# Altium PCB PCB_v1.PcbDoc
Units mm, origin at the board's own origin, x right, y up, seen from the top; angles counter-clockwise.
Board outline 95.88 x 51.31 mm, 2 copper layers (Top Layer, Bottom Layer); 63 components, 51 nets, 266 pads, 97 vias.
Unrouted connection lines stored in the file: 53.
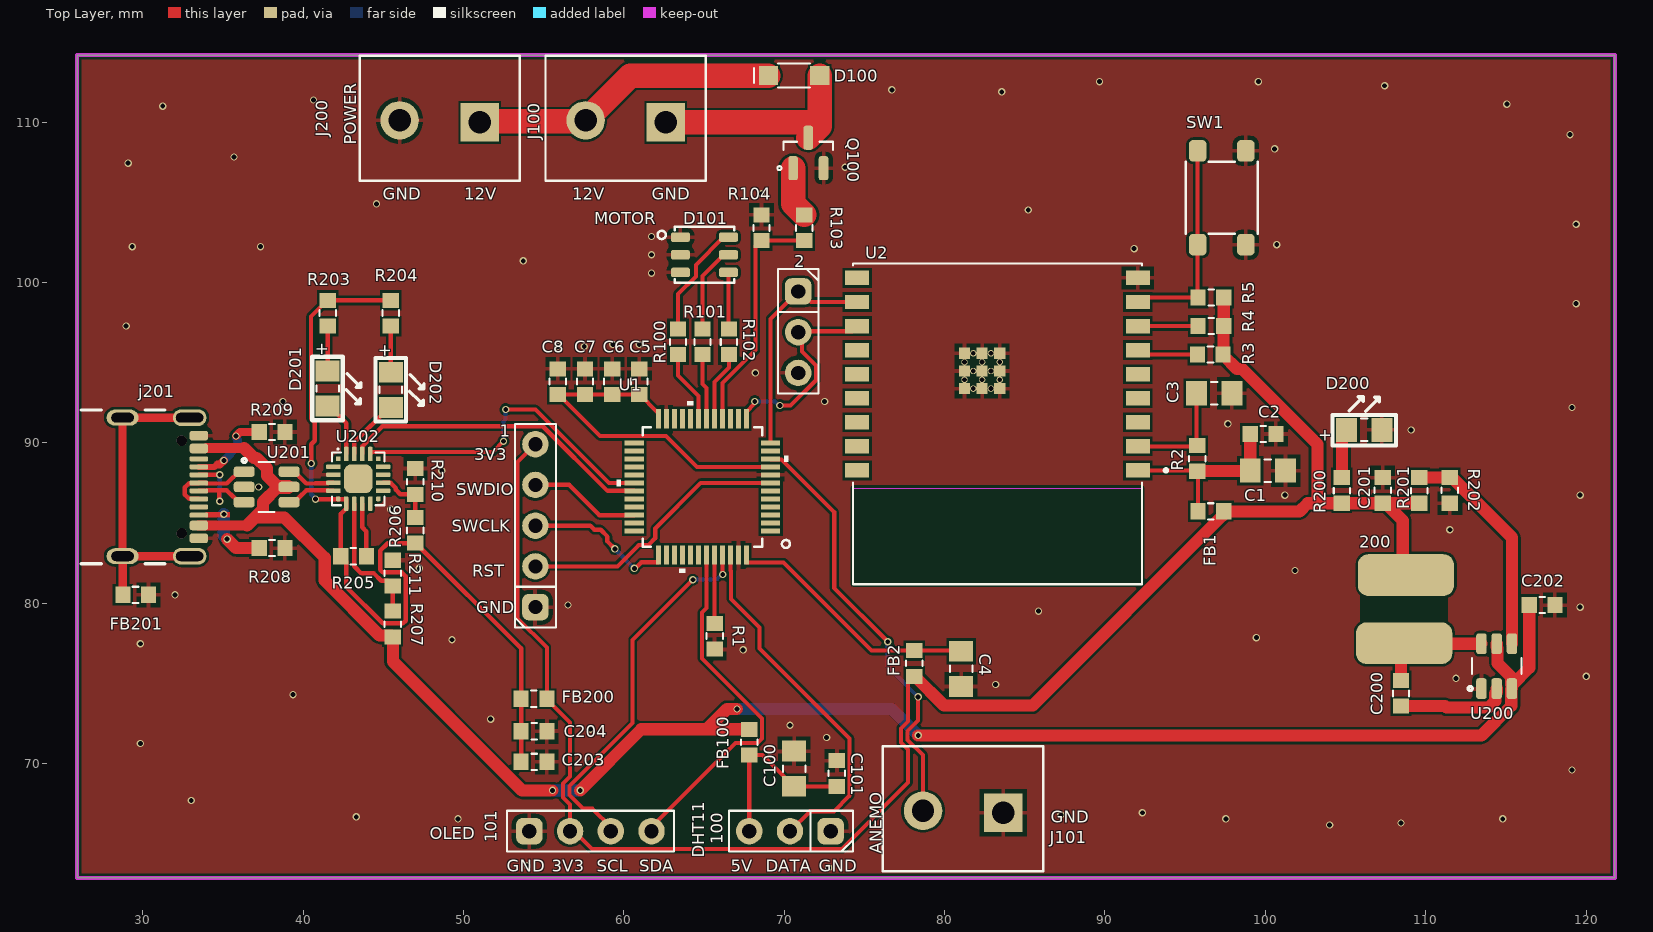
[diagram p0: Top Layer view]
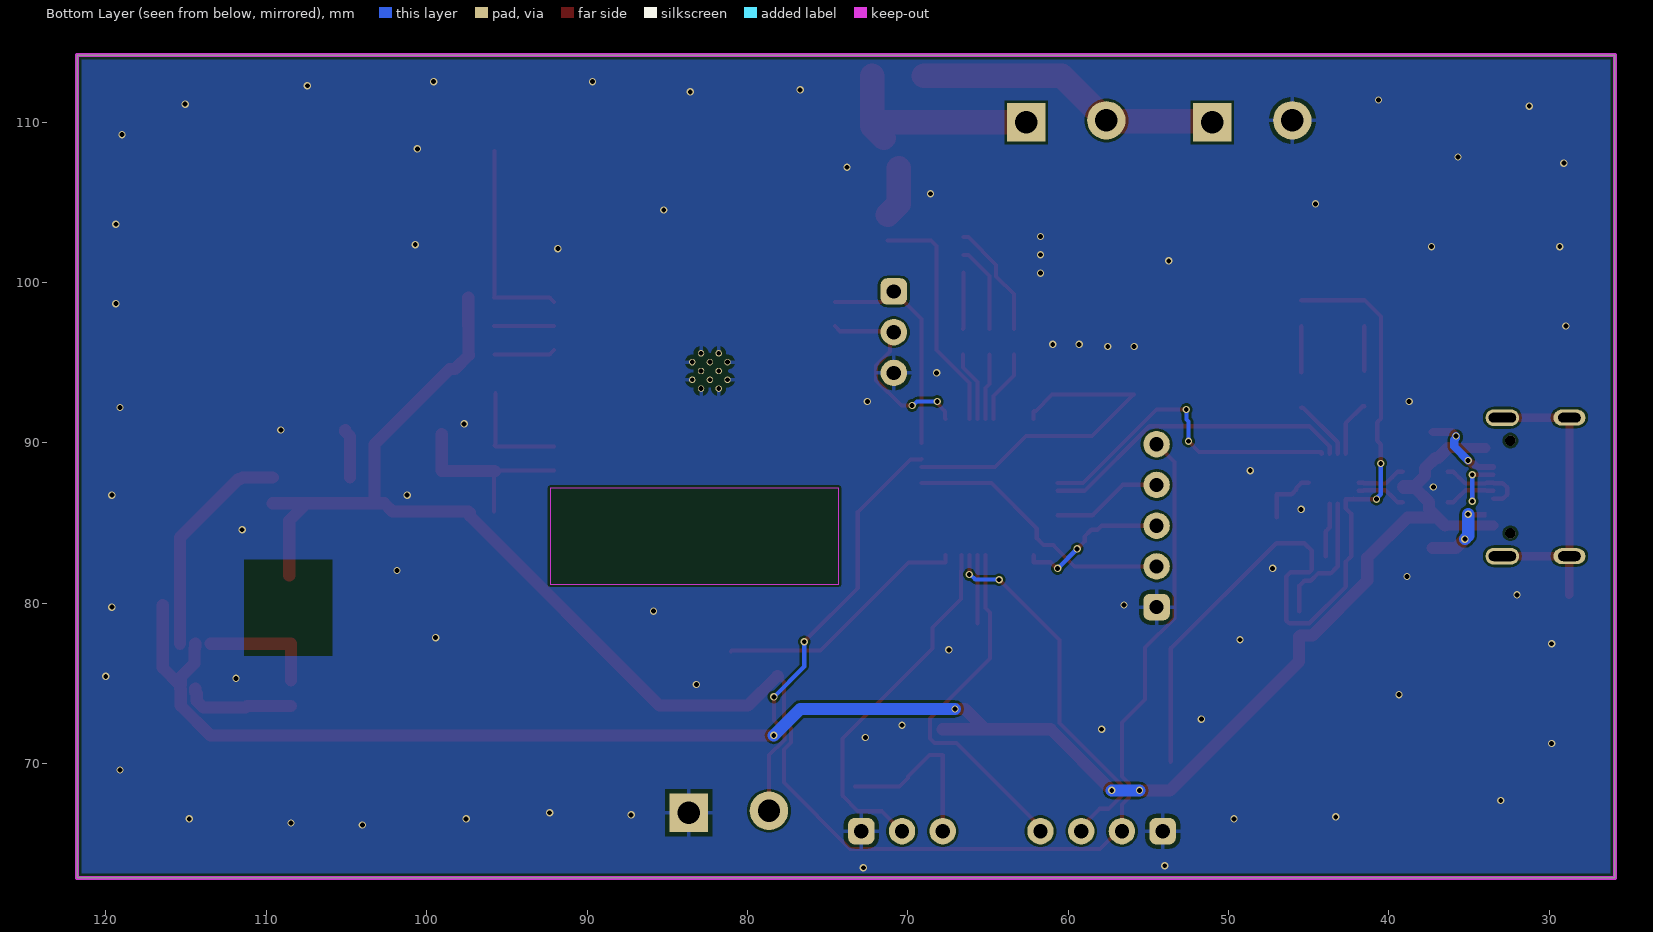
[diagram p1: Bottom Layer view, seen from below]
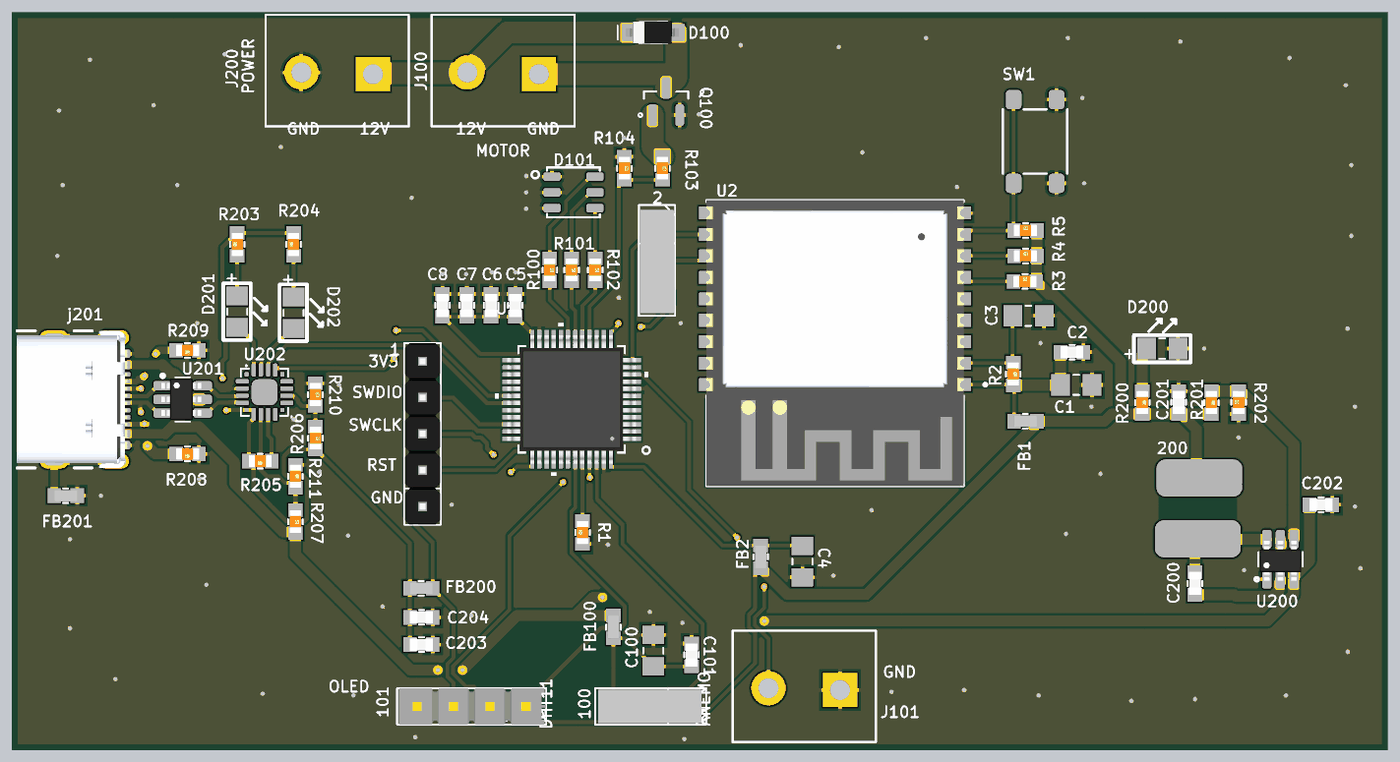
[diagram p2: 3D render of the assembled board from above, using the file's embedded part models]

## Layer stack, top to bottom
Top Solder: solder mask 0.0102, Solder Resist, Dk 3.5
Top Layer: signal copper 0.0356
Dielectric 1: dielectric 0.32, FR-4, Dk 4.8
Bottom Layer: signal copper 0.0356
Bottom Solder: solder mask 0.0102, Solder Resist, Dk 3.5

## Board outline
25.908,62.865 25.908,114.173 121.793,114.173 121.793,62.865

## Design rules (kind name [scope] priority, off if disabled: settings)
Clearance [All] p1: gap=0.152 ignorepadtopadclearanceinfootprint=FALSE
DiffPairsRouting DiffPairsRouting_USB [InDifferentialPairClass('USB_2.0')] p1: maxlimit=0.152 minlimit=0.152 mostfreqgap=0.152 toplayer_minwidth=0.279 toplayer_maxwidth=0.787 toplayer_prefwidth=0.787 bottomlayer_minwidth=0.279 bottomlayer_maxwidth=0.787 bottomlayer_prefwidth=0.787 maxuncoupledlength=12.7
HoleSize [All] p1: absolutevalues=TRUE maxlimit=25.4 minlimit=0.254 maxpercent=80.000 minpercent=20.000
MatchedLengths [InDifferentialPairClass('USB_2.0')] p1: tolerance=1.27 checknetsindiffpair=TRUE checkdiffpairvsdiffpair=FALSE checkxsignals=FALSE checkothers=FALSE
MinimumSolderMaskSliver [All] p1: minsoldermaskwidth=0.102
PolygonConnect PolygonConnect_via [IsVia] p1: connectstyle=Direct reliefconductorwidth=0.254 reliefentries=4 polygonreliefangle="90 Angle" airgapwidth=0.254
PolygonConnect [All] p2: connectstyle=Relief reliefconductorwidth=0.254 reliefentries=4 polygonreliefangle="90 Angle" airgapwidth=0.254
RoutingVias [All] p1: holewidth=0.305 width=0.457 viastyle="Through Hole" minholewidth=0.305 minwidth=0.457 maxholewidth=25.4 maxwidth=25.4
SilkToSilkClearance [All] p1: silktosilkclearance=0.025
SilkToSolderMaskClearance [IsPad] p1: minsilkscreentomaskgap=0.025 clearancetoexposedcopper=TRUE
SolderMaskExpansion [All] p1: expansion=0.102 istentingtop=FALSE
SupplyNets "Schematic Supply Nets_6" [InNet('3V3_ESP32')] p1: voltage=0.000
SupplyNets "Schematic Supply Nets_5" [InNet('3V3_CP')] p2: voltage=0.000
SupplyNets "Schematic Supply Nets_4" [InNet('VUSB')] p3: voltage=0.000
SupplyNets "Schematic Supply Nets_3" [InNet('3V3_MCU')] p4: voltage=0.000
SupplyNets "Schematic Supply Nets_2" [InNet('3V3')] p5: voltage=0.000
SupplyNets "Schematic Supply Nets_1" [InNet('GND')] p6: voltage=0.000
SupplyNets "Schematic Supply Nets" [InNet('12V')] p7: voltage=0.000
Width Width_3V3_1A [InNet('3V3')] p1: maxlimit=0.762 minlimit=0.254 preferedwidth=0.762
Width Width_2A [InNetClass('12V_2A')] p2: maxlimit=1.524 minlimit=0.254 preferedwidth=1.524
Width Width_1A [InNetClass('5V_1A')] p3: maxlimit=0.762 minlimit=0.254 preferedwidth=0.762
Width [All] p4: maxlimit=1.524 minlimit=0.152 preferedwidth=0.254
25 further rules are at their usual default settings.

## Classes and differential pairs
net class 12V_2A: 12V NetD100_2
net class 5V_1A: 3V3 Net200_1 NetC200_2 VUSB
differential pair class USB_2.0: DATA USB_D
component class Designator: 200 C200 C201 C202 C203 C204 D200 D201 D202 FB200 FB201 J200 j201 R200 R201 R202 R203 R204 R205 R206 R207 R208 R209 R210 R211 U200 U201 U202
differential pair USB_D: +USB_D_P -USB_D_N
differential pair DATA: +DATA_P -DATA_N

## Components (designator, comment, footprint, x,y, rotation, side; value= is the part's Value field where it differs from the comment)
1 "5x1" H_5x1_TH_100mil 54.483,84.836 r90 top
2 "3x1" H_3X1_TH_100mil 70.866,96.901 r270 top
100 "3x1" H_3X1_TH_100mil 70.358,65.786 r180 top
101 "4x1" H_4x1_TH_2.54mm 57.912,65.786 r0 top
200 "2.2uH 4A" Ind_5.8*5.2_NS 108.712,79.629 r90 top value=2.2uH
C1 "10uF 25V" 0805_cap 100.16,88.265 r0 top value=10uF
C2 "0.1uF 50V" 0603_cap 99.86,90.551 r0 top value=0.1uF
C3 "10uF 25V" 0805_cap 96.817,93.091 r0 top value=10uF
C4 "10uF 25V" 0805_cap 81.026,75.903 r270 top value=10uF
C5 "0.1uF 50V" 0603_cap 60.96,93.815 r90 top value=0.1uF
C6 "0.1uF 50V" 0603_cap 59.267,93.815 r90 top value=0.1uF
C7 "0.1uF 50V" 0603_cap 57.573,93.815 r90 top value=0.1uF
C8 "0.1uF 50V" 0603_cap 55.88,93.815 r90 top value=0.1uF
C100 "10uF 25V" 0805_cap 70.612,69.68 r90 top value=10uF
C101 "0.1uF 50V" 0603_cap 73.279,69.38 r90 top value=0.1uF
C200 "0.1uF 50V" 0603_cap 108.458,74.384 r270 top value=0.1uF
C201 "22uF 10V" 0603_cap 107.315,87.033 r90 top value=22uF
C202 "10uF 10V" 0603_cap 117.259,79.883 r0 top value=10uF
C203 "10uF 10V" 0603_cap 54.394,70.104 r0 top value=10uF
C204 "0.1uF 50V" 0603_cap 54.394,72.009 r0 top value=0.1uF
D100 "40V 1A" SOD_123 70.612,112.903 r0 top
D101 "RGB" RGB_NS_3.5X3.7 65.024,101.727 r0 top
D200 "2.9V" 0805_LED 106.172,90.805 r0 top
D201 "2.9V" 0805_LED 41.529,93.388 r270 top
D202 "2V" 0805_LED 45.466,93.302 r270 top
FB1 "60OHM 2A" 0603_fb 96.609,85.725 r180 top value="60 OHM"
FB2 "60OHM 2A" 0603_fb 78.105,76.238 r90 top value="60 OHM"
FB100 "60OHM 2A" 0603_fb 67.818,71.336 r270 top value="60 OHM"
FB200 "60OHM 2A" 0603_fb 54.394,74.041 r180 top value="60 OHM"
FB201 "60OHM 2A" 0603_fb 29.553,80.518 r180 top value="60 OHM"
J100 "Connector 2pos" CON_2x1_TH_5MM 60.111,110.236 r180 top
J101 "Connector 2pos" CON_2x1_TH_5MM 81.153,67.183 r180 top
J200 "Connector 2pos" CON_2x1_TH_5MM 48.514,110.236 r180 top
j201 "USB C" CON_USB_C_16P_RA 31.115,87.249 r270 top
Q100 "N CH" SOT_23_3 71.501,108.077 r90 top
R1 "10k 1/10W" 0603_res 65.659,77.94 r90 top value=10k
R2 "1k 1/10W" 0603_res 95.758,89.027 r270 top value=1k
R3 "1k 1/10W" 0603_res 96.571,95.504 r0 top value=1k
R4 "1k 1/10W" 0603_res 96.609,97.282 r0 top value=1k
R5 "1k 1/10W" 0603_res 96.609,99.06 r0 top value=1k
R100 "100R 1/10W" 0603_res 63.373,96.304 r270 top value=100R
R101 "100R 1/10W" 0603_res 64.897,96.304 r270 top value=100R
R102 "100R 1/10W" 0603_res 66.548,96.304 r270 top value=100R
R103 "10k 1/10W" 0603_res 71.247,103.416 r270 top value=10k
R104 "10k 1/10W" 0603_res 68.58,103.416 r270 top value=10k
R200 "100R 1/10W" 0603_res 104.775,87.033 r270 top value=100R
R201 "33k2 1/10W" 0603_res 109.601,87.033 r270 top value=33k2
R202 "10k 1/10W" 0603_res 111.506,87.033 r90 top value=10k
R203 "84R5 1/10W" 0603_res 41.529,98.082 r90 top value=84R5
R204 "150R 1/10W" 0603_res 45.466,98.082 r90 top value=150R
R205 "1k 1/10W" 0603_res 43.142,82.931 r180 top value=1k
R206 "10k 1/10W" 0603_res 46.99,84.544 r270 top value=10k
R207 "33k2 1/10W" 0603_res 45.593,78.702 r270 top value=33k2
R208 "4k7 1/10W" 0603_res 38.062,83.439 r180 top value=4k7
R209 "4k7 1/10W" 0603_res 38.062,90.678 r180 top value=4k7
R210 "10k 1/10W" 0603_res 46.99,87.592 r270 top value=10k
R211 "54k9 1/10W" 0603_res 45.593,81.877 r270 top value=54k9
SW1 "Sw" Sw_PUSH_4.5x4.5x5mm 97.282,105.283 r270 top
U1 "STM32F030C8T6TR" LQFP48_7x7mm 64.897,87.249 r180 top
U2 "ESP32-C3-WROOM-02-N4" ESP32-C3-WROOM-02-N4 83.299,94.282 r180 top
U200 "TPS564201DDCR" SOT_23_6 114.427,76.073 r90 top
U201 "USBLC6-2SC6" SOT_23_6 37.719,87.249 r0 top
U202 "CP2102N-A02-GQFN20R" WFQFN_20_EP_3X3MM 43.434,87.757 r0 top

## Footprints (in the part's own frame and the unit in brackets; to place one, negate y for a bottom-side part, rotate by r counter-clockwise, add the part's x,y. Pads: shape width x height; smd on the part's side, far side on the other; paste and mask are expansions set on the pad)
0603_cap [mil]
  rect 37x40 smd: 1(-31.5,0) 2(31.5,0)
  silkscreen extent -6,-20 8,20, body extent -31,-17 31,17, height 34
0603_fb [mil]
  rect 37x40 smd: 1(-31.5,0) 2(31.5,0)
  silkscreen extent -7,-20 8,20, body extent -32,-16 31,16, height 32
0603_res [mil] "1608 Metric / 20190225 / C-A.Serna.A"
  rect 37x40 smd: 1(-31.5,0) 2(31.5,0)
  silkscreen extent -7,-20 8,20, body extent -31,-16 32,16, height 12
0805_cap [mm]
  rect 1.3x1.5 smd: 1(-1.1,0) 2(1.1,0)
  silkscreen extent -0.2,-0.7 0.2,0.7, body extent -1.13,-0.7 1.07,0.7, height 1
0805_LED [mm]
  rect 1.3x1.5 smd: 1(-1.1,0) 2(1.1,0)
  silkscreen extent -1.98,-0.97 1.98,2.07, body extent -1,-0.62 1,0.63, height 1.1
CON_2x1_TH_5MM [mm]
  rect 2.4x2.4 hole 1.4: 1(-2.5,0.254)
  round 2.4 hole 1.4: 2(2.5,0.127)
  silkscreen extent -5,-3.9 5,3.9, body extent -5,-3.9 5,3.9, height 10.2
CON_USB_C_16P_RA [mm]
  oval 1.05x2.1 hole 0.6 slot 1.7 at 90 deg: 0(-4.32,1.803) 0(4.32,1.803)
  oval 1x2 hole 0.6 slot 1.4 at 90 deg: 0(-4.32,-2.377) 0(4.32,-2.377)
  rrect50% 0.6x1.15 smd: A1/B12(-3.2,2.378) A4/B9(-2.4,2.378) B1/A12(3.2,2.378) B4/A9(2.4,2.378)
  rrect50% 0.3x1.15 smd: A5(-1.25,2.378) A6(-0.25,2.378) A7(0.25,2.378) A8(1.25,2.378) B5(1.75,2.378) B6(0.75,2.378) B7(-0.75,2.378) B8(-1.75,2.378)
  round 0.65 hole 0.65 unplated: ""(-2.89,1.303) ""(2.89,1.303)
  silkscreen extent -4.79,-4.98 4.79,0.27, body extent -4.79,-4.98 4.79,2.73, height 3.31
ESP32-C3-WROOM-02-N4 [mm]
  rect 1.5x0.9 smd: 1(-8.75,6) 2(-8.75,4.5) 3(-8.75,3) 4(-8.75,1.5) 5(-8.75,0) 6(-8.75,-1.5) 7(-8.75,-3) 8(-8.75,-4.5) 9(-8.75,-6) 10(8.75,-6) 11(8.75,-4.5) 12(8.75,-3) 13(8.75,-1.5) 14(8.75,0) 15(8.75,1.5) 16(8.75,3) 17(8.75,4.5) 18(8.75,6)
  rect 0.7x0.7 smd: 19(-0.14,0.9) 19(-0.14,-0.2) 19(-0.14,-1.3) 19(0.96,0.9) 19(0.96,-0.2) 19(0.96,-1.3) 19(2.06,-1.3) 19(2.06,-0.2) 19(2.06,0.9)
  round 0.4 hole 0.3 mask+0: 19(-0.14,0.35) 19(-0.14,-0.75) 19(0.41,0.9) 19(0.41,-0.2) 19(0.41,-1.3) 19(0.96,0.35) 19(0.96,-0.75) 19(1.51,0.9) 19(1.51,-0.2) 19(1.51,-1.3) 19(2.06,-0.75) 19(2.06,0.35)
  Keep-Out Layer region: 9,7.1 -9,7.1 -9,13.1 9,13.1
  Keep-Out Layer region: 9,7.1 -9,7.1 -9,13.1 9,13.1
  silkscreen extent -10.6,-6.9 9,13.1, body extent -9,-6.9 9,13.1, height 3.35
H_3X1_TH_100mil [mil]
  rrect50% 65x65 hole 35: 1(-100,0)
  round 65 hole 35: 2(0,0) 3(100,0)
  silkscreen extent -155,-50 150,50, body extent -142,-46 142,46, height 320
H_4x1_TH_2.54mm [mil]
  rrect50% 65x65 hole 35: 1(-150,0)
  round 65 hole 35: 2(-50,0) 3(50,0) 4(150,0)
  silkscreen extent -205,-50 205,50, body extent -200,-50 205,50, height 420
H_5x1_TH_100mil [mil]
  rrect50% 65x65 hole 35: 1(-200,0)
  round 65 hole 35: 2(-100,0) 3(0,0) 4(100,0) 5(200,0)
  silkscreen extent -250,-50 250,50, body extent -250,-49 250,49, height 335
Ind_5.8*5.2_NS [mm]
  rrect50% 2.6x6 smd: 1(-2.125,0.053) 2(2.125,-0.053)
  body extent -3,-2.75 3,2.75, height 4.5
LQFP48_7x7mm [mm]
  rect 1.194x0.305 smd paste+0 mask+0.046: 1(-4.25,2.75) 2(-4.25,2.25) 3(-4.25,1.75) 4(-4.25,1.25) 5(-4.25,0.75) 6(-4.25,0.25) 7(-4.25,-0.25) 8(-4.25,-0.75) 9(-4.25,-1.25) 10(-4.25,-1.75) 11(-4.25,-2.25) 12(-4.25,-2.75) 25(4.25,-2.75) 26(4.25,-2.25) 27(4.25,-1.75) 28(4.25,-1.25) 29(4.25,-0.75) 30(4.25,-0.25) 31(4.25,0.25) 32(4.25,0.75) 33(4.25,1.25) 34(4.25,1.75) 35(4.25,2.25) 36(4.25,2.75)
  rect 0.305x1.194 smd paste+0 mask+0.046: 13(-2.75,-4.25) 14(-2.25,-4.25) 15(-1.75,-4.25) 16(-1.25,-4.25) 17(-0.75,-4.25) 18(-0.25,-4.25) 19(0.25,-4.25) 20(0.75,-4.25) 21(1.25,-4.25) 22(1.75,-4.25) 23(2.25,-4.25) 24(2.75,-4.25) 37(2.75,4.25) 38(2.25,4.25) 39(1.75,4.25) 40(1.25,4.25) 41(0.75,4.25) 42(0.25,4.25) 43(-0.25,4.25) 44(-0.75,4.25) 45(-1.25,4.25) 46(-1.75,4.25) 47(-2.25,4.25) 48(-2.75,4.25)
  silkscreen extent -5.46,-5.35 5.35,5.35, body extent -4.5,-4.5 4.5,4.5, height 1.6
RGB_NS_3.5X3.7 [mm]
  rrect50% 1.2x0.6 smd: 1(-1.5,1.1) 2(-1.5,0) 3(-1.5,-1.1) 4(1.5,-1.1) 5(1.5,0) 6(1.5,1.1)
  silkscreen extent -2.92,-1.75 1.85,1.75, body extent -1.85,-1.74 1.85,1.75, height 1
SOD_123 [mm]
  rect 1.2x1.2 smd: 1(-1.6,0) 2(1.6,0)
  silkscreen extent -2.5,-0.75 1,0.75, body extent -1.93,-0.8 1.77,0.8, height 1.28
SOT_23_3 [mm]
  rrect50% 1.5x0.6 smd: 1(-0.95,0.95) 2(-0.95,-0.95) 3(0.95,0)
  silkscreen extent -1.07,-1.55 0.7,1.92, body extent -0.7,-1.52 0.7,1.53, height 1.12
SOT_23_6 [mm]
  rrect50% 1.3x0.65 smd: 1(-1.4,0.95) 2(-1.4,0) 3(-1.4,-0.95) 4(1.4,-0.95) 5(1.4,0) 6(1.4,0.95)
  silkscreen extent -1.52,-1.55 0.5,1.78, body extent -1.5,-1.45 1.3,1.45, height 1.45
Sw_PUSH_4.5x4.5x5mm [mm]
  rrect50% 1.35x1.1 smd: 1(-2.925,1.5) 1(2.925,1.5) 2(-2.925,-1.5) 2(2.925,-1.5)
  silkscreen extent -2.25,-2.25 2.25,2.25, body extent -2.25,-2.25 2.25,2.25, height 5
WFQFN_20_EP_3X3MM [mm]
  rrect50% 0.3x0.3 smd: 1(-1.25,1.25) 6(-1.25,-1.25) 11(1.25,-1.25)
  rrect50% 0.9x0.3 smd: 2(-1.55,0.75) 3(-1.55,0.25) 4(-1.55,-0.25) 5(-1.55,-0.75) 12(1.55,-0.75) 13(1.55,-0.25) 14(1.55,0.25) 15(1.55,0.75)
  rrect50% 0.3x0.9 smd: 7(-0.75,-1.55) 8(-0.25,-1.55) 9(0.25,-1.55) 10(0.75,-1.55) 17(0.75,1.55) 18(0.25,1.55) 19(-0.25,1.55) 20(-0.75,1.55)
  rect 0.3x0.3 smd: 16(1.25,1.25)
  rrect50% 1.8x1.8 smd: 21(0,0)
  silkscreen extent -1.65,-1.65 1.65,1.9, body extent -1.5,-1.5 1.5,1.5, height 0.8

## Part data
1: library part H_Male_5x1_TH_100mil, "H_Male_5x1_TH_100mil", ComponentLink1Description=LCSC
2 100: library part H_Male_3x1_TH_100mil, "H_Male_3x1_TH_100mil", ComponentLink1Description=LCSC
101: library part H_Male_4x1_TH_100mil, "H_Male_4x1_TH_100mil", ComponentLink1Description=LCSC
200: library part Inductor_2.2uH_4A_5.8*5.2mm, "4A 2.2uH ±20% 22.1mΩ SMD,5.8x5.2mm Inductors (SMD) ROHS", Manufacturer="SHOU HAN", Manufacturer Part Number=CY54-2.2UH, Supplier Part Number 1=C2929427, ComponentLink1Description=LCSC, ComponentLink1URL=https://lcsc.com/product-detail/Inductors-SMD_SHOU-HAN-CY54-2-2UH_C2929427.html, Supplier 1=LCSC
C1 C3 C4 C100: library part Cap_10uF_0805_25V_, "25V 10uF X5R ±10% 0805 Multilayer Ceramic Capacitors MLCC - SMD/SMT ROHS", Manufacturer="Samsung Electro-Mechanics", Manufacturer Part Number=CL21A106KAYNNNE, Supplier Part Number 1=C15850, ComponentLink1Description=LCSC, ComponentLink1URL=https://lcsc.com/product-detail/Multilayer-Ceramic-Capacitors-MLCC-SMD-SMT_Samsung-Electro-Mechanics-CL21A106KAYNNNE_C15850.html, Supplier 1=LCSC
C2 C5 C6 C7 C8 C101 C200 C204: library part Cap_0.1uF_0603_50V, "50V 100nF Y5V -20%~+80% 0603 Multilayer Ceramic Capacitors MLCC - SMD/SMT ROHS", Manufacturer="Walsin Tech Corp", Manufacturer Part Number=0603F104Z500CT, Supplier Part Number 1=C83060, ComponentLink1Description=LCSC, ComponentLink1URL=https://www.lcsc.com/product-detail/Multilayer-Ceramic-Capacitors-MLCC-SMD-SMT_Walsin-Tech-Corp-0603F104Z500CT_C83060.html, Supplier 1=LCSC
C201: library part Cap_22uF_0603_10V, "10V 22uF X5R ±20% 0603 Multilayer Ceramic Capacitors MLCC - SMD/SMT ROHS", Manufacturer=HRE, Manufacturer Part Number=CGA0603X5R226M100JT, Supplier Part Number 1=C6119863, ComponentLink1Description=LCSC, ComponentLink1URL=https://lcsc.com/product-detail/Multilayer-Ceramic-Capacitors-MLCC-SMD-SMT_HRE-CGA0603X5R226M100JT_C6119863.html, Supplier 1=LCSC
C202 C203: library part Cap_10uF_0603_10V, "10V 10uF X5R ±10% 0603 Multilayer Ceramic Capacitors MLCC - SMD/SMT ROHS", Manufacturer=CCTC, Manufacturer Part Number=TCC0603X5R106K100CT, Supplier Part Number 1=C380314, ComponentLink1Description=LCSC, ComponentLink1URL=https://www.lcsc.com/product-detail/Multilayer-Ceramic-Capacitors-MLCC-SMD-SMT_CCTC-TCC0603X5R106K100CT_C380314.html, Supplier 1=LCSC
D100: library part D_Schottky_40V_1A_SOD_123F, "DIODE SCHOTTKY 40V 1A SOD123F", Manufacturer="Shanghai Prisemi Elec", Manufacturer Part Number=PSBD1DF40V1H, Supplier Part Number 1=C110730, ComponentLink1Description=LCSC, ComponentLink1URL=https://www.lcsc.com/product-detail/Switching-Diode_Shanghai-Prisemi-Elec-PSBD1DF40V1H_C110730.html, Supplier 1=LCSC
D101: library part LED_RGB_3535_SMD, "-30℃~+85℃ RGB 110° 3535(mm) Light Emitting Diodes (LED) ROHS", Manufacturer="Foshan NationStar Optoelectronics", Manufacturer Part Number=RS-3535MWAM, Supplier Part Number 1=C842778, ComponentLink1Description=LCSC, ComponentLink1URL=https://www.lcsc.com/product-detail/Light-Emitting-Diodes-LED_Foshan-NationStar-Optoelectronics-RS-3535MWAM_C842778.html, Supplier 1=LCSC
D200 D201: library part LED_0805_Green, "LED GREEN CLEAR 0805 SMD", Manufacturer=XINGLIGHT, Manufacturer Part Number=XL-2012UGC, Supplier Part Number 1=C965815, ComponentLink1Description=LCSC, ComponentLink1URL=https://www.lcsc.com/product-detail/Light-Emitting-Diodes-LED_XINGLIGHT-XL-2012UGC_C965815.html, Supplier 1=LCSC
D202: library part LED_0805_RED, "LED RED CLEAR 0805 SMD", Manufacturer=XINGLIGHT, Manufacturer Part Number=XL-2012SURC, Supplier Part Number 1=C965812, ComponentLink1Description=LCSC, ComponentLink1URL=https://www.lcsc.com/product-detail/Light-Emitting-Diodes-LED_XINGLIGHT-XL-2012SURC_C965812.html, Supplier 1=LCSC
FB1 FB2 FB100 FB200 FB201: library part FB_60_0603_2A, "2A 1 100mΩ 60Ω@100MHz ±25% 0603 Ferrite Beads ROHS", Manufacturer=TAI-TECH, Manufacturer Part Number=HCB1608KF-600T20, Supplier Part Number 1=C369516, ComponentLink1Description=LCSC, ComponentLink1URL=https://www.lcsc.com/product-detail/Ferrite-Beads_TAI-TECH-HCB1608KF-600T20_C369516.html, Supplier 1=LCSC
J100 J101 J200: library part Con_2x1_TH_5mm, "2POS 5MM", Manufacturer=JILN, Manufacturer Part Number=JL126-50002G01, Supplier Part Number 1=C394556, ComponentLink1Description=Digi-Key, ComponentLink1URL=https://www.lcsc.com/product-detail/Screw-terminal_JILN-JL126-50002G01_C394556.html, Supplier 1=LCSC
j201: library part CON_USB_TYPEC_16P, "3A USB 3.1 1 Surface Mount 16P Female -40℃~+85℃ Type-C SMD USB Connectors ROHS", Manufacturer="SHOU HAN", Manufacturer Part Number=TYPE-C-3.1-16PIN, Supplier Part Number 1=C7507405, ComponentLink1Description=LCSC, ComponentLink1URL=https://lcsc.com/product-detail/USB-Connectors_SHOU-HAN-TYPE-C-3-1-16PIN_C7507405.html, Supplier 1=LCSC
Q100: library part Q_NFET_20V_3.2A_SOT23, "MOSFET N-CH 20V SOT23", Manufacturer=Doeshare, Manufacturer Part Number=DN2302S, Supplier Part Number 1=C2931750, ComponentLink1Description=LCSC, ComponentLink1URL=https://www.lcsc.com/product-detail/MOSFETs_Doeshare-DN2302S_C2931750.html, Supplier 1=LCSC
R1 R103 R104 R202 R206 R210: library part Res_10k_0603_1/10W, "RES SMD 10k OHM 5% 1/10W 0603", Manufacturer=FOJAN, Manufacturer Part Number=FRC0603J103TS, Supplier Part Number 1=C2930027, ComponentLink1Description=LCSC, ComponentLink1URL=https://www.lcsc.com/product-detail/Chip-Resistor-Surface-Mount_FOJAN-FRC0603J103TS_C2930027.html, Supplier 1=LCSC
  R206 R210: Usage=NM
R2 R3 R4 R5 R205: library part Res_1k_0603_1/10W, "RES SMD 1k OHM 5% 1/10W 0603", Manufacturer=FOJAN, Manufacturer Part Number="FRC0603J102 TS", Supplier Part Number 1=C2907113, ComponentLink1Description=LCSC, ComponentLink1URL=https://www.lcsc.com/product-detail/Chip-Resistor-Surface-Mount_FOJAN-FRC0603J102-TS_C2907113.html, Supplier 1=LCSC
R100 R101 R102 R200: library part Res_100R_0603_1/10W, "RES SMD 100R OHM 5% 1/10W 0603", Manufacturer=FOJAN, Manufacturer Part Number="FRC0603J101 TS", Supplier Part Number 1=C2907089, ComponentLink1Description=LCSC, ComponentLink1URL=https://www.lcsc.com/product-detail/Chip-Resistor-Surface-Mount_FOJAN-FRC0603J101-TS_C2907089.html, Supplier 1=LCSC
R201 R207: library part Res_33k2_0603_1/10W, "100mW Thick Film Resistor 75V ±100ppm/℃ ±1% 33.2kΩ 0603 Chip Resistor - Surface Mount ROHS", Manufacturer=YAGEO, Manufacturer Part Number=RC0603FR-0733K2L, Supplier Part Number 1=C185338, ComponentLink1Description=LCSC, ComponentLink1URL=https://lcsc.com/product-detail/Chip-Resistor-Surface-Mount_YAGEO-RC0603FR-0733K2L_C185338.html, Supplier 1=LCSC
R203: library part Res_84R5_0603_1/10W, "100mW Thick Film Resistor 50V ±100ppm/℃ ±1% 84.5Ω 0603 Chip Resistor - Surface Mount ROHS", Manufacturer="LIZ Elec", Manufacturer Part Number=CR0603FA84R5G, Supplier Part Number 1=C101216, ComponentLink1Description=LCSC, ComponentLink1URL=https://lcsc.com/product-detail/Chip-Resistor-Surface-Mount_LIZ-Elec-CR0603FA84R5G_C101216.html, Supplier 1=LCSC
R204: library part Res_150R_0603_1/10W, "100mW Thick Film Resistor 75V ±100ppm/℃ ±1% 150Ω 0603 Chip Resistor - Surface Mount ROHS", Manufacturer=RALEC, Manufacturer Part Number=RTT031500FTP, Supplier Part Number 1=C103302, ComponentLink1Description=LCSC, ComponentLink1URL=https://lcsc.com/product-detail/Chip-Resistor-Surface-Mount_RALEC-RTT031500FTP_C103302.html, Supplier 1=LCSC
R208 R209: library part Res_4k7_0603_1/10W, "100mW Thick Film Resistor 75V ±1% 4.7kΩ 0603 Chip Resistor - Surface Mount ROHS", Manufacturer=VO, Manufacturer Part Number=SCR0603F4K7, Supplier Part Number 1=C3016318, ComponentLink1Description=LCSC, ComponentLink1URL=https://lcsc.com/product-detail/Chip-Resistor-Surface-Mount_VO-SCR0603F4K7_C3016318.html, Supplier 1=LCSC
R211: library part Res_54k9_0603_1/10W, "100mW Thick Film Resistor 75V ±100ppm/℃ ±1% 54.9kΩ 0603 Chip Resistor - Surface Mount ROHS", Manufacturer=YAGEO, Manufacturer Part Number=RC0603FR-0754K9L, Supplier Part Number 1=C185321, ComponentLink1Description=LCSC, ComponentLink1URL=https://lcsc.com/product-detail/Chip-Resistor-Surface-Mount_YAGEO-RC0603FR-0754K9L_C185321.html, Supplier 1=LCSC
SW1: library part Sw_PUSH_4.5x4.5x5.0xmm, "SWITCH TACTILE SPST-NO 0.05A 12V", Manufacturer=BZCN, Manufacturer Part Number=TSC015A05026A, Supplier Part Number 1=C2888509, ComponentLink1Description=LCSC, ComponentLink1URL=https://www.lcsc.com/product-detail/Tactile-Switches_BZCN-TSC015A05026A_C2888509.html, Last modified by=N-A.Potosi, Last modified date=20190222, Supplier 1=LCSC
U1: library part IC_STM32F030C8T6TR_LQFP48_7x7MM, "IC MCU 32BIT 64KB FLASH 48LQFP", Manufacturer=STMicroelectronics, Supplier Part Number 1=C23922, ComponentLink1Description=LCSC, ComponentLink1URL=https://www.lcsc.com/product-detail/ST-Microelectronics_STMicroelectronics-STM32F030C8T6_C23922.html, Manufacturer Part Number=STM32F030C8T6TR, Supplier 1=LCSC
U2: library part MCU_ESP32-C3-WROOM-02-N4, "RF TXRX MOD BT WIFI PCB TH SMD", Manufacturer="Espressif Systems", Supplier Part Number 1=C2934560, ComponentLink1Description=LCSC, ComponentLink1URL=https://lcsc.com/product-detail/WiFi-Modules_Espressif-Systems-ESP32-C3-WROOM-02-N4_C2934560.html, Manufacturer Part Number=ESP32-C3-WROOM-02-N4, Supplier 1=LCSC
U200: library part DCDC_SW_BUCK_4A_SOT23-6, "IC REG BUCK ADJ 4A SOT23", Manufacturer="Texas Instruments", Supplier Part Number 1=C464812, ComponentLink1Description=LCSC, ComponentLink1URL=https://lcsc.com/product-detail/DC-DC-Converters_Texas-Instruments-TPS564201DDCR_C464812.html, Manufacturer Part Number=TPS564201DDCR, Supplier 1=LCSC
U201: library part TVS_5.25V_2CH_SOT_23_6, "TVS DIODE 5.25V 17V SOT23-6", Manufacturer=STMicroelectronics, Supplier Part Number 1=C7519, ComponentLink1Description=LCSC, ComponentLink1URL=https://www.lcsc.com/product-detail/ESD-Protection-Devices_STMicroelectronics-USBLC6-2SC6_C7519.html, Manufacturer Part Number=USBLC6-2SC6, Supplier 1=LCSC
U202: library part IC_SGL_USB2UART-BRIDGE_20QFN, "IC USB TO UART BRIDGE QFN20", Manufacturer="Silicon Labs", Supplier Part Number 1=C969913, ComponentLink1Description=LCSC, ComponentLink1URL=https://www.lcsc.com/product-detail/USB-ICs_SILICON-LABS-CP2102N-A02-GQFN20R_C969913.html, Manufacturer Part Number=CP2102N-A02-GQFN20R, Supplier 1=LCSC

## Via types
v1: diameter 0.457, hole 0.305, Top Layer to Bottom Layer, tented both sides, 75 vias
v2: diameter 0.457, hole 0.305, Top Layer to Bottom Layer, 22 vias

## Nets (pads, with @x,y where several pads share a name; then routed paths per layer and width w, separated by ;. In a path a pad name is that pad's centre, name@x,y a point inside that pad or via, vN(x,y) a via of type N, cw(c..) or ccw(c..) an arc to the next point about the centre after c; other vN are vias at no path point)
3V3: 1.5 101.2 200.2 C201.1 FB1.1 FB2.1 FB200.1 R3.2 R4.2 R5.2 R200.2 R201.2 | length 114.4
  Top Layer w0.254: 1.5 53.378,88.811 53.378,79.057 55.194,77.24 FB200.1 55.194,74.003 56.642,72.555 56.642,69.2 56.21,68.768 56.21,67.884 56.642,67.452 56.642,66.04 58.001,64.681 73.597,64.681 77.724,68.808 77.724,70.881 77.292,71.313 77.292,72.197 77.724,72.629 77.724,75.095 78.067,75.438 FB2.1
  Top Layer w0.762: FB2.1 78.143,75.438 79.962,73.62 85.491,73.62 97.32,85.449 97.32,85.636 FB1.1 102.133,85.725 102.641,86.233 103.251,86.233 ; R3.2@97.371,95.466 98.236,94.601 98.562,94.601 103.251,89.911 103.251,86.233 ; R3.2 97.39,95.523 97.39,97.263 R4.2 R5.2 ; C201.1 R200.2 103.251,86.233 ; 200.2@108.565,81.72 108.565,85.148 107.48,86.233 R201.2
3V3_CP: C203.1 C204.1 FB200.2 R203.2 R204.2 R205.2 R206.2 U202.6 U202.7 | length 54
  Top Layer w0.279: v2(40.5,88.715) 40.5,89.918 40.716,90.134 40.716,91.288 40.487,91.517 40.487,97.878 41.491,98.882 R203.2 R204.2 ; v2(40.767,86.487) 40.777,86.497 42.174,86.497 U202.6 42.194,86.497 42.674,86.497 42.684,86.486 U202.7 42.684,85.907 42.342,85.565 R205.2 42.672,82.601 42.672,81.032 44.964,78.74 46.222,78.74 46.393,78.911 46.393,81.668 46.146,81.915 44.964,81.915 44.793,82.086 44.793,83.268 45.269,83.744 R206.2 47.028,83.744 53.594,77.178 FB200.2 C204.1 C203.1
  Bottom Layer w0.279: v2(40.5,88.715) 40.5,86.802 40.767,86.535 v2(40.767,86.487)
3V3_ESP32: C1.1 C2.1 FB1.2 R2.2 U2.1 | length 11.9
  Top Layer w0.254: U2.1 95.703,88.282 R2.2 95.809,88.176 FB1.2
  Top Layer w0.762: R2.2 95.777,88.246 99.041,88.246 C1.1 C2.1
3V3_MCU: C4.1 C5.1 C6.1 C7.1 C8.1 FB2.2 U1.1 U1.9 U1.24 U1.48 | length 38.4
  Top Layer w0.254: U1.24 62.147,91.943 62.122,91.969 62.044,91.969 60.998,93.015 C5.1 C6.1 C7.1 C8.1 55.918,93.015 58.502,90.431 62.636,90.431 64.568,88.499 U1.9 ; U1.48 67.647,82.555 67.672,82.529 69.953,82.529 75.444,77.038 FB2.2 80.991,77.038 C4.1
12V: D100.1 J100.2 J200.1 | length 19.2
  Top Layer w1.524: J200.1 51.078,110.045 57.547,110.045 J100.2 60.405,112.903 D100.1
ADC_ANEMO: J101.2 U1.10 | length 26.8
  Top Layer w0.254: U1.10 69.172,88.974 69.817,88.974 73.116,85.674 73.116,80.935 v2(76.454,77.597) ; v2(78.347,74.156) 78.347,72.677 77.699,72.029 77.699,71.481 78.653,70.527 J101.2
  Bottom Layer w0.254: v2(76.454,77.597) 76.454,76.049 v2(78.347,74.156)
DATA_N: U201.4 U202.5 | length 3.1
  Top Layer w0.279: U201.4 39.456,86.299 39.789,86.632 39.795,86.632 40.196,87.033 40.932,87.033 40.939,87.041 41.55,87.041 41.584,87.007 U202.5
DATA_P: U201.6 U202.4 | length 3.1
  Top Layer w0.279: U201.6 39.456,88.199 39.789,87.866 39.795,87.866 40.196,87.465 40.753,87.465 40.761,87.473 41.55,87.473 41.584,87.507 U202.4
DHT11_PIN: 100.2 U1.46 | length 22.7
  Top Layer w0.254: U1.46 66.647,82.026 66.675,81.998 66.675,80.264 68.453,78.486 68.453,77.165 74.066,71.552 74.066,67.994 73.096,67.024 71.596,67.024 100.2
ESP_EN: C3.1 R2.1 U2.2 | length 7
  Top Layer w0.254: U2.2 95.713,89.782 R2.1 95.717,89.868 C3.1
ESP_RX: 2.2 U1.13 U2.12 | length 13.1
  Top Layer w0.254: U1.13 67.672,91.524 67.672,91.969 68.121,92.418 68.121,92.536 v2(68.16,92.575) ; v2(69.723,92.329) 70.397,92.329 71.971,93.903 71.971,94.819 71.095,95.694 71.095,96.672 2.2 70.924,96.959 74.226,96.959 U2.12
  Bottom Layer w0.254: v2(68.16,92.575) 69.422,92.575 69.668,92.329 v2(69.723,92.329)
ESP_TX: 2.1 U1.12 U2.11 | length 14.1
  Top Layer w0.254: U1.12 69.147,97.722 2.1 71.021,99.441 71.68,98.782 U2.11
GND: 1.1 2.3 100.1 101.1 C1.2 C2.2 C3.2 C4.2 C5.2 C6.2 C7.2 C8.2 C100.2 C101.2 C201.2 C202.2 C203.2 C204.2 D101.1 D101.2 D101.3 D200.2 FB201.1 J101.1 J200.2 j201.A1/B12 j201.B1/A12 Q100.2 R1.1 R104.1 R202.1 R208.1 R209.1 R210.1 R211.1 SW1.1 U1.8 U1.23 U1.47 U2.9 U2.19 U200.1 U201.2 U202.3 U202.12 U202.21
  other v1: 72.771,63.5 53.975,63.627 104.013,66.167 108.458,66.294 49.657,66.548 97.536,66.548 114.808,66.548 43.307,66.675 87.249,66.802 92.329,66.929 33.02,67.691 119.126,69.596 29.845,71.247 72.644,71.628 57.912,72.136 70.358,72.39 51.689,72.771 39.37,74.295 83.185,74.93 111.887,75.311 120.015,75.438 67.437,77.089 29.845,77.47 49.276,77.724 99.441,77.851 85.852,79.502 119.634,79.756 56.515,79.883 32.004,80.518 38.862,81.661 101.854,82.042 47.244,82.169 111.506,84.582 45.466,85.852 101.219,86.741 119.634,86.741 37.219,87.249 48.641,88.265 109.093,90.805 97.663,91.186 119.126,92.202 38.735,92.583 72.517,92.583 68.199,94.361 55.88,96.012 57.531,96.012 59.309,96.139 60.96,96.139 28.956,97.282 119.38,98.679 61.722,100.584 53.721,101.346 61.722,101.727 91.821,102.108 29.337,102.235 37.338,102.235 100.711,102.362 61.722,102.87 119.38,103.632 85.217,104.521 44.577,104.902 68.58,105.537 73.787,107.188 29.083,107.442 35.687,107.823 100.584,108.331 118.999,109.22 31.242,110.998 115.062,111.125 40.64,111.379 83.566,111.887 76.708,112.014 107.442,112.268 89.662,112.522 99.568,112.522
Net100_3: 100.3 C100.1 C101.1 FB100.2 | length 11.1
  Top Layer w0.254: 100.3 FB100.2 68.656,70.536 69.989,69.203 69.989,69.103 70.512,68.58 C100.1 C101.1
Net200_1: 200.1 C200.1 U200.6 | length 7.3
  Top Layer w0.762: C200.1 108.458,77.47 108.46,77.472 113.476,77.472 U200.6
NetC200_2: C200.2 U200.2 | length 6.9
  Top Layer w0.762: C200.2 111.209,73.584 111.303,73.49 113.928,73.49 114.335,73.897 114.335,74.368 114.427,74.46 U200.2
NetD100_2: D100.2 J100.1 Q100.3 | length 13.9
  Top Layer w1.524: J100.1 71.968,109.982 72.212,109.738 ; Q100.3 72.212,109.738 ; D100.2 72.212,109.738
NetD101_4: D101.4 R102.1 | length 3.5
  Top Layer w0.254: D101.4 66.524,97.128 R102.1
NetD101_5: D101.5 R101.1 | length 5.5
  Top Layer w0.254: R101.1 64.897,100.4 66.224,101.727 D101.5
NetD101_6: D101.6 R100.1 | length 7.2
  Top Layer w0.254: R100.1 63.373,99.269 64.491,100.386 64.491,101.094 66.224,102.827 D101.6
NetD200_1: D200.1 R200.1 | length 3.1
  Top Layer w0.762: R200.1 104.775,90.408 105.072,90.705 D200.1
NetD201_1: D201.1 R203.1 | length 2.8
  Top Layer w0.279: D201.1 R203.1
NetD201_2: D201.2 U202.20 | length 3.5
  Top Layer w0.279: D201.2 41.629,92.288 42.684,91.233 U202.20
NetD202_1: D202.1 R204.1 | length 2.9
  Top Layer w0.279: D202.1 R204.1
NetD202_2: D202.2 U202.19 | length 3.9
  Top Layer w0.279: U202.19 43.194,89.317 43.194,90.03 45.366,92.202 D202.2
NetFB201_2: FB201.2 j201.0 | length 19.4
  Top Layer w0.508: FB201.2 28.745,80.526 28.745,82.921 j201.0@28.738,82.929 ; j201.0@32.918,82.929 j201.0@28.738,82.929 ; j201.0@32.918,91.569 28.738,91.569 j201.0@28.738,82.929
Netj201_A5: j201.A5 R209.2 | length 5.2
  Top Layer w0.381: j201.A5 34.478,88.499 34.625,88.646 34.651,88.646
  Top Layer w0.508: 34.651,88.646 34.798,88.646 v2(35.052,88.9) ; v2(35.814,90.424) 36.068,90.678 R209.2
  Bottom Layer w0.508: v2(35.052,88.9) 35.921,89.769 35.921,90.19 35.814,90.297 v2(35.814,90.424)
Netj201_B5: j201.B5 R208.2 | length 3.9
  Top Layer w0.762: v2(35.255,83.998) 35.814,83.439 R208.2
  Bottom Layer w0.762: v2(35.052,85.547) 35.052,84.201 v2(35.255,83.998)
NetQ100_1: Q100.1 R103.1 | length 3.2
  Top Layer w1.524: Q100.1 70.551,104.912 R103.1
NetR1_2: R1.2 U1.44 | length 4.3
  Top Layer w0.254: U1.44 65.647,78.752 R1.2
NetR3_1: R3.1 U2.6 | length 3.8
  Top Layer w0.254: U2.6 92.327,95.504 R3.1
NetR4_1: R4.1 U2.7 | length 3.8
  Top Layer w0.254: U2.7 R4.1
NetR5_1: R5.1 SW1.2 U2.8 | length 13
  Top Layer w0.254: U2.8 92.327,99.06 R5.1 95.782,99.087 95.782,102.358 SW1.2@95.782,108.208
NetR201_1: R201.1 R202.2 U200.4 | length 13.9
  Top Layer w0.762: R201.1 R202.2 111.595,87.744 111.727,87.744 115.377,84.094 U200.4
NetR205_1: R205.1 U202.9 | length 3.4
  Top Layer w0.279: U202.9 43.684,84.732 43.942,84.474 R205.1
R\S\T\: 1.2 U1.7 | length 17.2
  Top Layer w0.254: 1.2 59.588,82.296 60.928,83.635 61.538,83.635 61.955,84.052 61.955,84.663 64.791,87.499 U1.7
SCL_OLED: 101.3 U1.45 | length 23.2
  Top Layer w0.254: 101.3@59.182,66.04 58.042,67.18 57.489,67.18 56.617,68.052 56.617,68.6 60.547,72.53 60.547,77.712 v2(64.3,81.465) ; U1.45 66.157,82.989 66.157,81.798 v2(66.167,81.788)
  Bottom Layer w0.254: v2(64.3,81.465) 65.789,81.465 66.112,81.788 v2(66.167,81.788)
SDA_OLED: 101.4 U1.43 | length 22.3
  Top Layer w0.254: 101.4@61.722,66.04 66.967,71.285 68.34,71.285 68.605,71.55 68.605,72.82 64.872,76.554 64.872,79.417 65.147,79.692 U1.43
SYS_SWCLCK: 1.3 U1.37 | length 9.6
  Top Layer w0.279: 1.3 57.912,84.836 58.166,84.582 58.547,84.582 58.974,84.155 58.974,83.849 v2(59.436,83.388) ; v2(60.655,82.169) 60.703,82.169 61.076,82.542 62.134,82.542 62.147,82.555 U1.37
  Bottom Layer w0.279: v2(59.436,83.388) v2(60.655,82.169)
SYS_SWDIO: 1.4 U1.34 | length 6.9
  Top Layer w0.279: 1.4 56.59,87.376 58.467,85.499 U1.34
T3C1_MOTOR_PWM: R103.2 R104.2 U1.16 | length 14.8
  Top Layer w0.254: U1.16 66.147,93.73 68.199,95.782 68.199,102.273 68.542,102.616 R104.2 R103.2
T3C2_R_LED: R102.2 U1.17 | length 4.4
  Top Layer w0.254: U1.17 65.647,93.805 66.548,94.706 R102.2
T3C3_G_LED: R101.2 U1.18 | length 4.1
  Top Layer w0.254: R101.2 64.897,93.677 65.147,93.427 U1.18
T3C4_B_LED: R100.2 U1.19 | length 4.5
  Top Layer w0.254: R100.2 63.373,94.189 64.647,92.915 U1.19
USB_D_N: j201.A7 j201.B7 U201.3 | length 6.8
  Top Layer w0.279: j201.A7 33.918,86.999 33.952,87.033 34.731,87.033 ; j201.B7 33.499,88.005 34.792,88.005 v2(34.798,88.011) ; v2(34.798,86.36) 34.764,86.394 34.764,87.001 34.731,87.033 ; U201.3 35.982,86.299 35.649,86.632 35.643,86.632 35.242,87.033 34.731,87.033
  Bottom Layer w0.279: v2(34.798,86.36) v2(34.798,88.011)
USB_D_P: j201.A6 j201.B6 U201.1 | length 5.6
  Top Layer w0.279: j201.B6 33.482,86.509 32.888,86.509 32.625,86.772 32.625,87.226 32.888,87.489 33.482,87.489 j201.A6 33.918,87.499 33.952,87.465 34.553,87.465 35.242,87.465 35.643,87.866 35.649,87.866 35.982,88.199 U201.1
USB_DETECT: R207.1 R211.2 U202.8 | length 8.4
  Top Layer w0.279: U202.8 43.18,86.203 43.18,82.302 43.628,81.855 44.414,81.855 44.861,81.407 45.263,81.407 R211.2 R207.1
USB_RX: U1.31 U202.18 | length 19.6
  Top Layer w0.279: U202.18 43.694,89.317 43.694,89.786 44.941,91.034 54.946,91.034 58.981,86.999 U1.31
USB_TX: U1.30 U202.17 | length 20.6
  Top Layer w0.254: U202.17 44.184,89.413 44.207,89.436 51.825,89.436 v2(52.489,90.101) ; v2(52.629,92.075) 54.497,92.075 59.073,87.499 U1.30
  Bottom Layer w0.254: v2(52.489,90.101) 52.489,91.338 52.616,91.465 52.616,92.062 v2(52.629,92.075)
VUSB: C202.1 FB100.1 j201.A4/B9 j201.B4/A9 R207.2 U200.3 U200.5 U201.5 | length 116.2
  Top Layer w0.635: j201.B4/A9 36.503,84.849 ; j201.A4/B9@33.963,89.679 36.305,89.679
  Top Layer w0.762: 36.305,89.679 36.927,89.057 37.095,89.057 37.737,88.415 37.737,87.947 38.379,87.305 39.063,87.305 U201.5 39.063,87.193 38.379,87.193 37.502,86.317 37.502,85.848 37.003,85.349 ; 36.503,84.849 37.003,85.349 ; v2(55.55,68.326) 53.64,68.326 45.593,76.373 R207.2 45.504,77.991 44.761,77.991 41.338,81.414 41.338,82.829 38.819,85.349 37.003,85.349 ; v2(57.277,68.326) 61.087,72.136 65.151,72.136 ; v2(67.056,73.406) 66.421,73.406 65.151,72.136 ; FB100.1 65.151,72.136 ; v2(78.359,71.755) 113.486,71.755 115.341,73.61 115.341,74.637 U200.3 ; U200.5 114.427,77.26 114.483,77.204 114.483,76.251 115.321,75.413 115.321,74.942 115.377,74.886 116.459,75.968 C202.1
  Bottom Layer w0.762: v2(55.55,68.326) v2(57.277,68.326) ; v2(67.056,73.406) 76.708,73.406 v2(78.359,71.755)
WAKE_UP: R206.1 R210.2 U202.13 | length 3.8
  Top Layer w0.279: U202.13 44.994,87.497 45.463,87.497 45.787,87.173 45.787,87.068 46.063,86.792 R210.2 R206.1
pads on no net: j201. j201.A8 j201.B8 U1.2 U1.3 U1.4 U1.5 U1.6 U1.11 U1.14 U1.15 U1.20 U1.21 U1.22 U1.25 U1.26 U1.27 U1.28 U1.29 U1.32 U1.33 U1.35 U1.36 U1.38 U1.39 U1.40 U1.41 U1.42 U2.3 U2.4 U2.5 U2.10 U2.13 U2.14 U2.15 U2.16 U2.17 U2.18 U202.1 U202.2 U202.10 U202.11 U202.14 U202.15 U202.16

## Polygon pours and split planes (outlines as drawn)
GND on Top Layer "GND_TOP" (solid, remove dead copper, pour order 0): 25.908,62.865 25.908,114.173 121.793,114.173 121.793,62.865
GND on Bottom Layer "GND_BOT" (solid, remove dead copper, pour order 2): 25.908,62.865 25.908,114.173 121.793,114.173 121.793,62.865

## Keep-outs
Keep-Out Layer:
  the board outline again, w0.254

## Other copper
Top Layer:
  rectangle net Netj201_B5: 33.909,85.344 35.433,85.674
Multi-Layer:
  pour cut-out: 105.888,82.722 111.388,82.722 111.388,76.722 105.888,76.722

## Silkscreen, mask and mechanical layers (free items; w line width, h text height)
Top Overlay:
  text "POWER" at 43.307,108.585 h0.76 r90
  text "GND" at 44.958,105.156 h0.76
  text "12V" at 50.038,105.156 h0.76
  text "12V" at 56.769,105.156 h0.76
  text "GND" at 61.722,105.156 h0.76
  text "MOTOR" at 58.166,103.632 h0.76
  text "3V3" at 50.673,88.9 h0.76
  text "SWDIO" at 49.53,86.741 h0.76
  text "SWCLK" at 49.276,84.455 h0.76
  text "RST" at 50.546,81.661 h0.76
  text "GND" at 50.8,79.375 h0.76
  text "GND" at 86.614,66.294 h0.76
  text "OLED" at 47.879,65.278 h0.76
  text "ANEMO" at 76.073,64.389 h0.76 r90
  text "DHT11" at 65.024,64.135 h0.76 r90
  text "GND" at 52.705,63.246 h0.76
  text "3V3" at 55.499,63.246 h0.76
  text "SCL" at 58.293,63.246 h0.76
  text "SDA" at 60.96,63.246 h0.76
  text "5V" at 66.675,63.246 h0.76
  text "DATA" at 68.834,63.246 h0.76
  text "GND" at 72.136,63.246 h0.76
Board Shape:
  the board outline again, w0.254

## Text inside footprints (layer, text, board x,y; h text height)
D200: Top Overlay "+" at 103.302,90.119 h0.76
D201: Top Overlay "+" at 40.843,96.258 h0.76 r270
D202: Top Overlay "+" at 44.78,96.172 h0.76 r270